# Altium PCB PetLaserBolt.PcbDoc
Units mil, origin at the board's own origin, x right, y up, seen from the top; angles counter-clockwise.
Board outline 2165.35 x 984.25 mil, 2 copper layers (Top Layer, Bottom Layer); 18 components, 12 nets, 64 pads, 0 vias.
Unrouted connection lines stored in the file: 2.
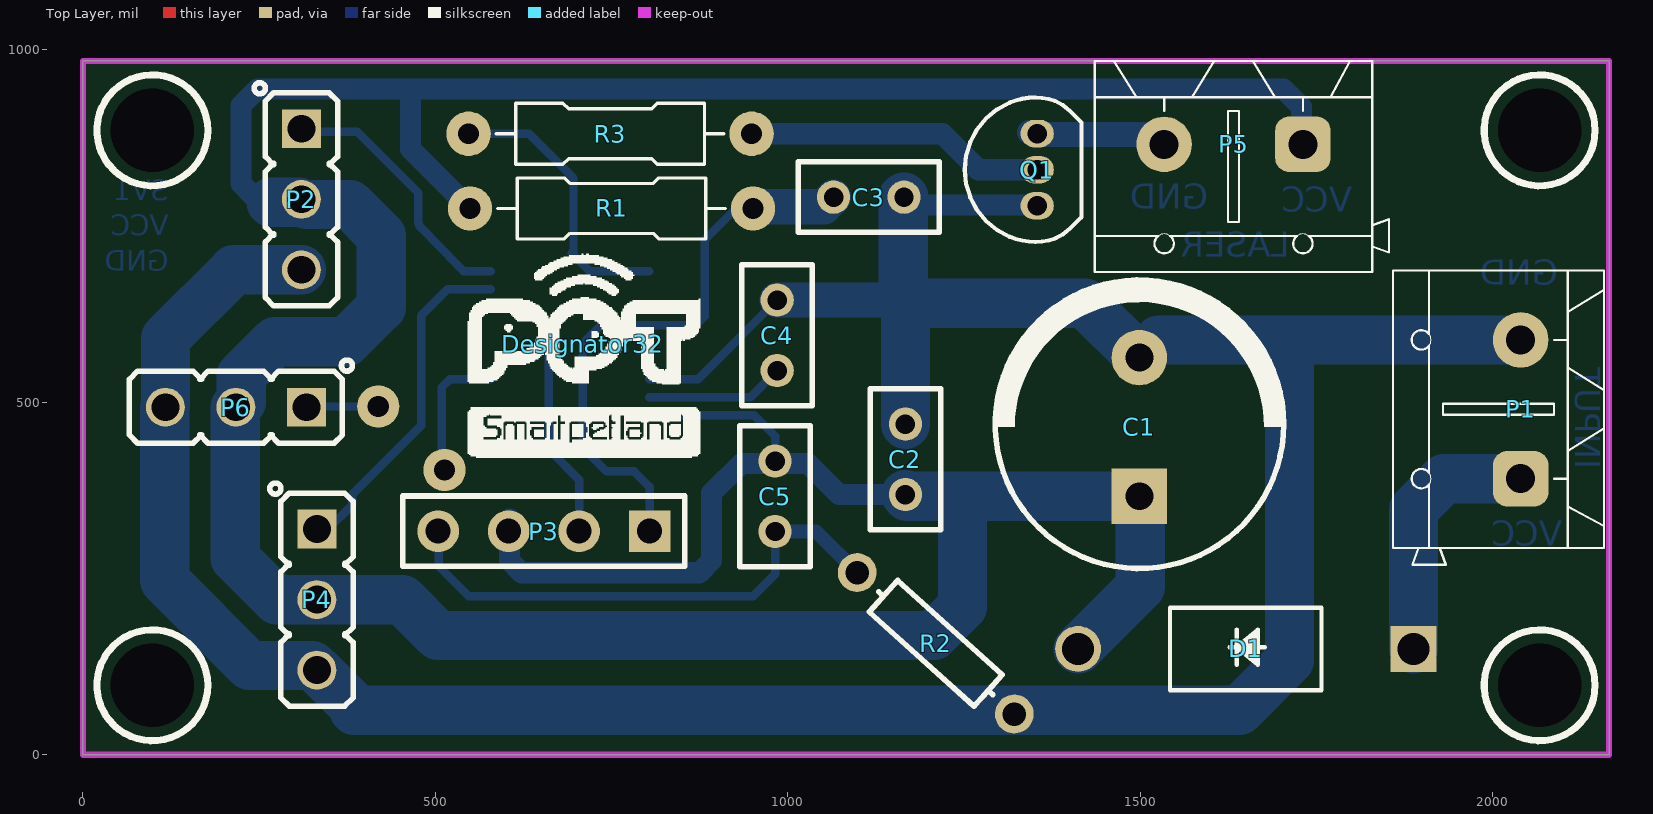
[diagram p0: Top Layer view]
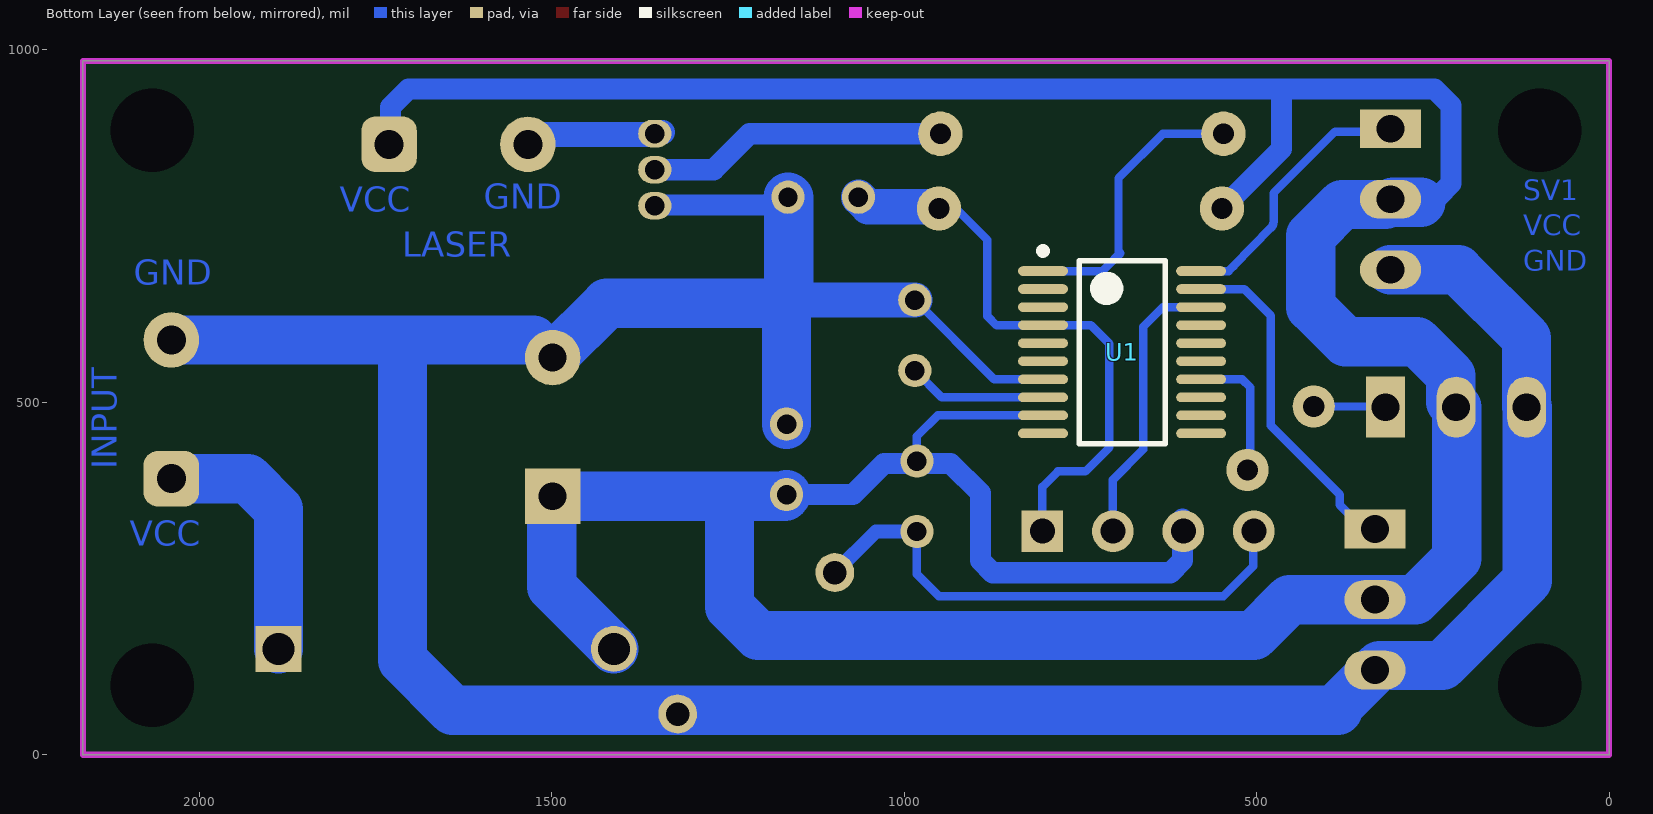
[diagram p1: Bottom Layer view, seen from below]
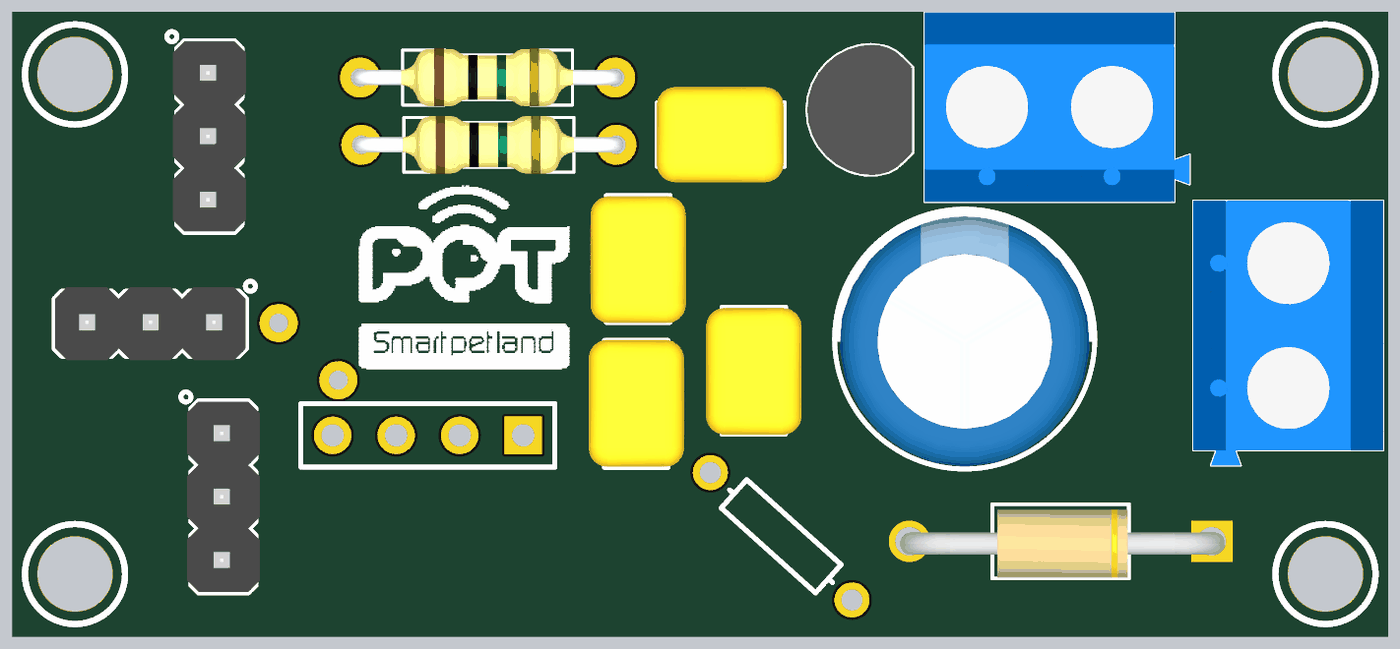
[diagram p2: 3D render of the assembled board from above, using the file's embedded part models]

## Layer stack, top to bottom
Top Solder: solder mask 0.4, Solder Resist, Dk 3.5
Top Layer: signal copper 1.4
Dielectric 1: dielectric 12.6, FR-4, Dk 4.8
Bottom Layer: signal copper 1.4
Bottom Solder: solder mask 0.4, Solder Resist, Dk 3.5

## Board outline
0,0 2165.35,0 2165.35,984.25 0,984.25

## Design rules (kind name [scope] priority, off if disabled: settings)
Clearance [All] p1: gap=12 ignorepadtopadclearanceinfootprint=TRUE
PolygonConnect [All] p1: connectstyle=Relief reliefconductorwidth=10 reliefentries=4 polygonreliefangle="90 Angle" airgapwidth=10
RoutingVias [All] p1: holewidth=28 width=50 viastyle="Through Hole" minholewidth=28 minwidth=50 maxholewidth=28 maxwidth=50
SolderMaskExpansion [All] p1: expansion=4 istentingtop=FALSE
Width [All] p1: maxlimit=500 minlimit=10 preferedwidth=20 minimp=50.000000 maximp=50.000000 favimp=50.000000
30 further rules are at their usual default settings.

## Classes and differential pairs
component class PetLaserBolt: C1 C2 C3 C4 C5 D1 P1 P2 P3 P4 P5 P6 Q1 R1 R2 R3 U1

## Components (designator, comment, footprint, x,y, rotation, side; value= is the part's Value field where it differs from the comment)
C1 "Cap2" "Cap electrolitic radial 10x16-5" 1499,465 r90 top value=1000uF
C2 "Cap" CAP_MLCC_RAD_0.1 1167,419 r270 top value=100nF
C3 "Cap" CAP_MLCC_RAD_0.1 1115,791 r180 top value=100nF
C4 "Cap" CAP_MLCC_RAD_0.1 985,595 r270 top value=1uF
C5 "Cap" CAP_MLCC_RAD_0.1 982,366.57 r90 top value=100nF
D1 "1n4007" DO-204AL 1655,155 r180 top
Designator32 "Comment" Logo_SmartPetLand 709,583 r0 top
P1 "Header 2" "KF301 2PIN" 2040,490 r90 top
P2 "Servo1" HDR_1x3 310,788 r270 top
P3 "Header 4" HDR1X4 804,317 r180 top
P4 "Servo2" HDR_1x3 332,220 r270 top
P5 "Laser" "KF301 2PIN" 1632.57,866 r180 top
P6 "Servo1" HDR_1x3 217,493 r180 top
Q1 "2N3904" "TO-92 STR" 1354,830 r90 top
R1 "Res1" "Axial 0_25 W, 0_4 IN LEAD PITCH" 750,775 r0 top value=10K
R2 "Res1" axial-0.3 1210.07,157.93 r318 top value=0R
R3 "Res1" "Axial 0_25 W, 0_4 IN LEAD PITCH" 748,881 r0 top value=100R
U1 "STM8S003FP6" TSSOP20 691,571 r180 bottom

## Footprints (in the part's own frame and the unit in brackets; to place one, negate y for a bottom-side part, rotate by r counter-clockwise, add the part's x,y. Pads: shape width x height; smd on the part's side, far side on the other; paste and mask are expansions set on the pad)
"Axial 0_25 W, 0_4 IN LEAD PITCH" [mm] "Designer Abbas Basereh"
  round 1.6 hole 0.75: 1(5.1,0) 2(-5.1,0)
  silkscreen extent -4.1,-1.1 4.1,1.1, body extent -5.4,-1.16 5.36,1.16, height 3.63
axial-0.3 [mm] "Axial Device, Thru-Hole; 2 Leads; 0.3 in Pin Spacing"
  round 1.4 hole 0.85: 1(-3.81,0) 2(3.81,0)
  silkscreen extent -2.77,-0.76 2.77,0.76
"Cap electrolitic radial 10x16-5" [mm] "Cap electrolitic radial 10x16-5-Design:Abbas Basereh"
  rect 2x2 hole 1: 1(-2.5,0)
  round 2 hole 1: 2(2.5,0)
  silkscreen extent -5.1,-5.2 5.3,5.2, body extent -5,-5 5,5, height 16
CAP_MLCC_RAD_0.1 [mm]
  round 1.2 hole 0.7: 1(-1.27,0) 2(1.27,0)
  silkscreen extent -2.54,-1.27 2.54,1.27, body extent -2.51,-1.91 2.57,1.91, height 7.36
DO-204AL [mil]
  rect 65x65 hole 45 mask+0: 1(-233,5)
  round 65 hole 45 mask+0: 2(243,5)
  silkscreen extent -103,-54 112,64, body extent -253,-45 257,62, height 107
HDR1X4 [mm] "Connector; Header; 4 Position"
  rect 1.5x1.5 hole 0.9: 1(0,0)
  round 1.5 hole 0.9: 2(2.54,0) 3(5.08,0) 4(7.62,0)
  silkscreen extent -1.27,-1.27 8.89,1.27
HDR_1x3 [mm] "Header /Jumper box-Designer Abbas Basereh"
  rect 1.4x1.4 / inner rect 1.4x1.4 / far side rect 1.4x2.2 hole 1 mask+0.1: 1(-2.54,0)
  round 1.4 / inner round 1.4 / far side oval 1.4x2.2 hole 1 mask+0.1: 2(0,0) 3(2.54,0)
  silkscreen extent -4.2,-1.7 3.84,1.3, body extent -3.82,-1.46 3.8,1.46, height 8.61
"KF301 2PIN" [mm] "Designer Abbas Basereh"
  rrect50% 2x2 hole 1.05: 1(-2.5,0)
  round 2 hole 1.05: 2(2.5,0)
  silkscreen extent -5.6,-3 5,4.6, body extent -5.6,-3 5,4.6, height 10
Logo_SmartPetLand [mil]
  silkscreen extent -163,-161 167,127
"TO-92 STR" [mm] "DESIGNER :ABBAS BASEREH"
  oval 1x1.2 hole 0.7 mask+0.06: 1(-1.3,0) 2(0,0) 3(1.3,0)
  silkscreen extent -2.6,-1.59 2.6,2.61, body extent -2.61,-1.59 2.61,2.61, height 10
TSSOP20 [mm]
  oval 1.8x0.35 smd: 1(-2.85,2.925) 2(-2.85,2.275) 3(-2.85,1.625) 4(-2.85,0.975) 5(-2.85,0.325) 6(-2.85,-0.325) 7(-2.85,-0.975) 8(-2.85,-1.625) 9(-2.85,-2.275) 10(-2.85,-2.925) 11(2.85,-2.925) 12(2.85,-2.275) 13(2.85,-1.625) 14(2.85,-0.975) 15(2.85,-0.325) 16(2.85,0.325) 17(2.85,0.975) 18(2.85,1.625) 19(2.85,2.275) 20(2.85,2.925)
  silkscreen extent -2.98,-3.3 1.55,3.77, body extent -3.3,-3.3 3.3,3.3, height 1.2

## Part data
C1 C2 C3 C4 C5: "Capacitor", Publisher="Altium Limited"
  C1: PackageDescription="Capacitor; 2 Leads", PackageReference=CAPR5-4X5, Published=23-Sep-2002
  C2 C3 C4 C5: LatestRevisionDate=17-Jul-2002, LatestRevisionNote="Re-released for DXP Platform.", PackageDescription="Radial Cap, Thru-Hole; 2 Leads; 0.3 in Pin Spacing", PackageReference=RAD-0.3, Published=8-Jun-2000
D1: library part Diode, "Default Diode", Code_JEDEC=DO-214-AB, LatestRevisionDate=17-Jul-2002, LatestRevisionNote="Re-released for DXP Platform.", PackageDescription="DO-214-AB/SMC; 2 C-Bend Leads; Body 7.9 x 5.9 mm, inc. leads (LxW)", PackageReference=SMC, PackageVersion=Sep-1996, Published=8-Jun-2000, Publisher="Altium Limited"
P1: "Header, 2-Pin", LatestRevisionDate=17-Jul-2002, LatestRevisionNote="Re-released for DXP Platform.", Publisher="Altium Limited"
P2 P4 P6: library part "Header 3", "Header, 3-Pin", LatestRevisionDate=17-Jul-2002, LatestRevisionNote="Re-released for DXP Platform.", Publisher="Altium Limited"
P3: "Header, 4-Pin", LatestRevisionDate=17-Jul-2002, LatestRevisionNote="Re-released for DXP Platform.", Publisher="Altium Limited"
P5: library part "Header 2", "Header, 2-Pin", LatestRevisionDate=17-Jul-2002, LatestRevisionNote="Re-released for DXP Platform.", Publisher="Altium Limited"
Q1: "NPN General Purpose Amplifier", ComponentLink1Description="Manufacturer Link", ComponentLink1URL=http://www.fairchildsemi.com/, ComponentLink2Description=Datasheet, ComponentLink2URL=http://www.fairchildsemi.com/ds/2N%2F2N3904.pdf, DatasheetVersion=1997, LatestRevisionDate=15-Jan-2003, LatestRevisionNote="PCB Footprint 'BCY-W3/D4.7' replaced", PackageDescription="TO, Flat Index; 3 In-Line, Axial Leads; Body Dia. 4.5mm; Leads 0.51 x 0.48 mm (max)", PackageReference=TO-92A, PackageVersion=Sep-1998, Published=8-Jun-2000, Publisher="Altium Limited"
R1 R2 R3: "Resistor", LatestRevisionDate=17-Jul-2002, LatestRevisionNote="Re-released for DXP Platform.", PackageDescription="Axial Device, Thru-Hole; 2 Leads; 0.3 in Pin Spacing", PackageReference=AXIAL-0.3, Published=8-Jun-2000, Publisher="Altium Limited"
U1: library part STM8S003F3Px, "8 bit microcontroller"

## Free pads (board coordinates)
  round 60 hole 118.11: 20(98.43,98.43) 20(98.43,885.83) 20(2066.93,98.43) 20(2066.93,885.83)
  round 60 hole 30: 21(419,494) 22(513,404)

## Nets (pads, with @x,y where several pads share a name; then routed paths per layer and width w, separated by ;. In a path a pad name is that pad's centre, name@x,y a point inside that pad or via, vN(x,y) a via of type N, cw(c..) or ccw(c..) an arc to the next point about the centre after c; other vN are vias at no path point)
ADCIN: P6.1 pad.21 pad.22 U1.14 | length 295.7
  Bottom Layer w12: P6.1 318,494 pad.21 ; pad.22 508.97,408.03 508.97,520.97 520.61,532.61 U1.14
GND: C1.2 C2.1 C3.1 C4.1 C5.1 P1.2 P2.3 P3.4 P4.3 P6.3 Q1.1 R2.1 R2.2 U1.7 | length 5309.5
  Bottom Layer w12: P3.4@505,334 505,267 547,225 951,225 982,256 C5.1 ; U1.7 872.61,532.61 C4.1
  Bottom Layer w20: C5.1 1040.32,316.57 R2.1
  Bottom Layer w30: C3.1 1169.67,791 1180.67,780 Q1.1@1354,780
  Bottom Layer w50: C4.1 1163.5,645
  Bottom Layer w70: P6.3@116,493 116,247 236.54,126.46 325.54,126.46 P4.3 332.87,120 384.8,68.07 384.8,63 1321.54,63 1641,63 1712,134 1712,588.43 ; P6.3 117,591 214,688 P2.3 ; 1164,644.5 1164,790 C3.1 ; C2.1 1167,641.5 1168.07,640.42 1422,640.42 C1.2 ; C1.2@1526.37,588.43 1712,588.43 ; P1.2 1712,588.43
Laser: R3.2 U1.1 | length 402.6
  Bottom Layer w12: R3.2 633,881 696,818 696,714 693.51,711.51 711.81,693.19 718.84,686.16 723.81,686.16 U1.1
NetC4_2: C4.2 U1.8 | length 197.5
  Bottom Layer w12: U1.8 947.02,507.02 C4.2
NetD1_1: D1.1 P1.1 | length 368
  Bottom Layer w70: D1.1 1888,348 1931.57,391.57 P1.1
NetP5_2: P5.2 Q1.3 | length 196.9
  Bottom Layer w35: Q1.3@1343,883 Q1.3@1354,883 ; Q1.3@1354,880 1508.31,880 1522.31,866 P5.2
NetQ1_2: Q1.2 R3.1 | length 426.3
  Bottom Layer w30: R3.1 1219.4,881 1270.4,830 Q1.2
NRST: C3.2 P3.1 R1.1 U1.4 | length 810.1
  Bottom Layer w12: P3.1 804,380 782,402 743,402 709,436 709,583 735.39,609.39 U1.4 803.55,609.05 856.57,609.05 856.62,609 869,609 882,622 882,730.21 R1.1@926.79,775
  Bottom Layer w50: R1.1 953.27,777.48 1051.48,777.48 C3.2
PWM_SERVO1: P2.1 U1.20 | length 378.9
  Bottom Layer w12: P2.1 314,884 388.72,884 476,796.71 476,756.15 ccw(c488,756.15) 479.42,747.76 532.78,693.19 539.81,686.16 U1.20
PWM_SERVO2: P4.1 U1.19 | length 487.9
  Bottom Layer w12: P4.1 347.75,320 382,354.25 382,369 480,467 480,623 517.57,660.57 U1.19
SWIM: P3.2 U1.18 | length 401.6
  Bottom Layer w12: U1.18 633.02,634.98 661,607 661,433 704,390 P3.2
VCC: C1.1 C2.2 C5.2 D1.2 P2.2 P3.3 P4.2 P5.1 P6.2 R1.2 U1.9 | length 5544.6
  Bottom Layer w12: U1.9 952.57,481.43 982,452 C5.2
  Bottom Layer w30: 257.77,792.81 241.57,792.81 224,810.38 224,826.57 224,921 247.56,944.56 466,944.56 ; P2.2@294.29,788 P2.2 ; R1.2 464.72,859.5 464.72,943.27 466,944.56 ; P3.3@605,334 605,275.57 622.57,258 874.43,258 892,275.57 892,371 934.28,413.28 978.7,413.28 C5.2 985.3,413.28 1028.72,413.28 1073,369 C2.2 ; P5.1 1729,868 1729,919 1703.44,944.56 466,944.56
  Bottom Layer w70: P6.2@216,493 216,278.8 274.8,220 P4.2 453,220 504,169 1207,169 1248.01,210.01 1248.01,362 ; P6.2 224.44,500.44 224.44,537.78 272.67,586 374,586 423,635 423,736.27 378.72,780.56 P2.2@317.44,780.56 ; 267,784 P2.2@306,784 ; C2.2 1169.43,366.57 C1.1 ; D1.2 1500,238 C1.1@1500,366.57
pads on no net: U1.2 U1.3 U1.5 U1.6 U1.10 U1.11 U1.12 U1.13 U1.15 U1.16 U1.17

## Keep-outs
Keep-Out Layer:
  the board outline again, w9

## Other copper
Bottom Layer:
  text "GND" at 1597,762.64 h60
  text "VCC" at 1801,758 h60
  text "LASER" at 1712,694.64 h60
  text "SV1 / VCC / GND" at 122,677 h50
  text "GND" at 2093,654.64 h60
  text "INPUT" at 2105.64,405 h60 r270
  text "VCC" at 2099,284 h60

## Silkscreen, mask and mechanical layers (free items; w line width, h text height)
Top Overlay:
  circle w10: c98.43,885.83 r78.74
  circle w10: c98.43,98.43 r78.74
  circle w10: c2066.93,98.43 r78.74
  circle w10: c2066.93,885.83 r78.74

## Dimensions
0,0 to 2165.35,0 on Mechanical 15
0,984.25 to 0,0 on Mechanical 15